# Altium PCB slave.PcbDoc (part 7 of 8)
Units mm, origin at the board's own origin, x right, y up, seen from the top; angles counter-clockwise.
Board outline 160 x 100 mm, 6 copper layers (Top, FUSED_VBAT-, Signals1, Signals2, SUPPLY, Bottom), stack 1.67 mm thick; 582 components, 375 nets, 1615 pads, 3043 vias.
Unrouted connection lines stored in the file: 1.
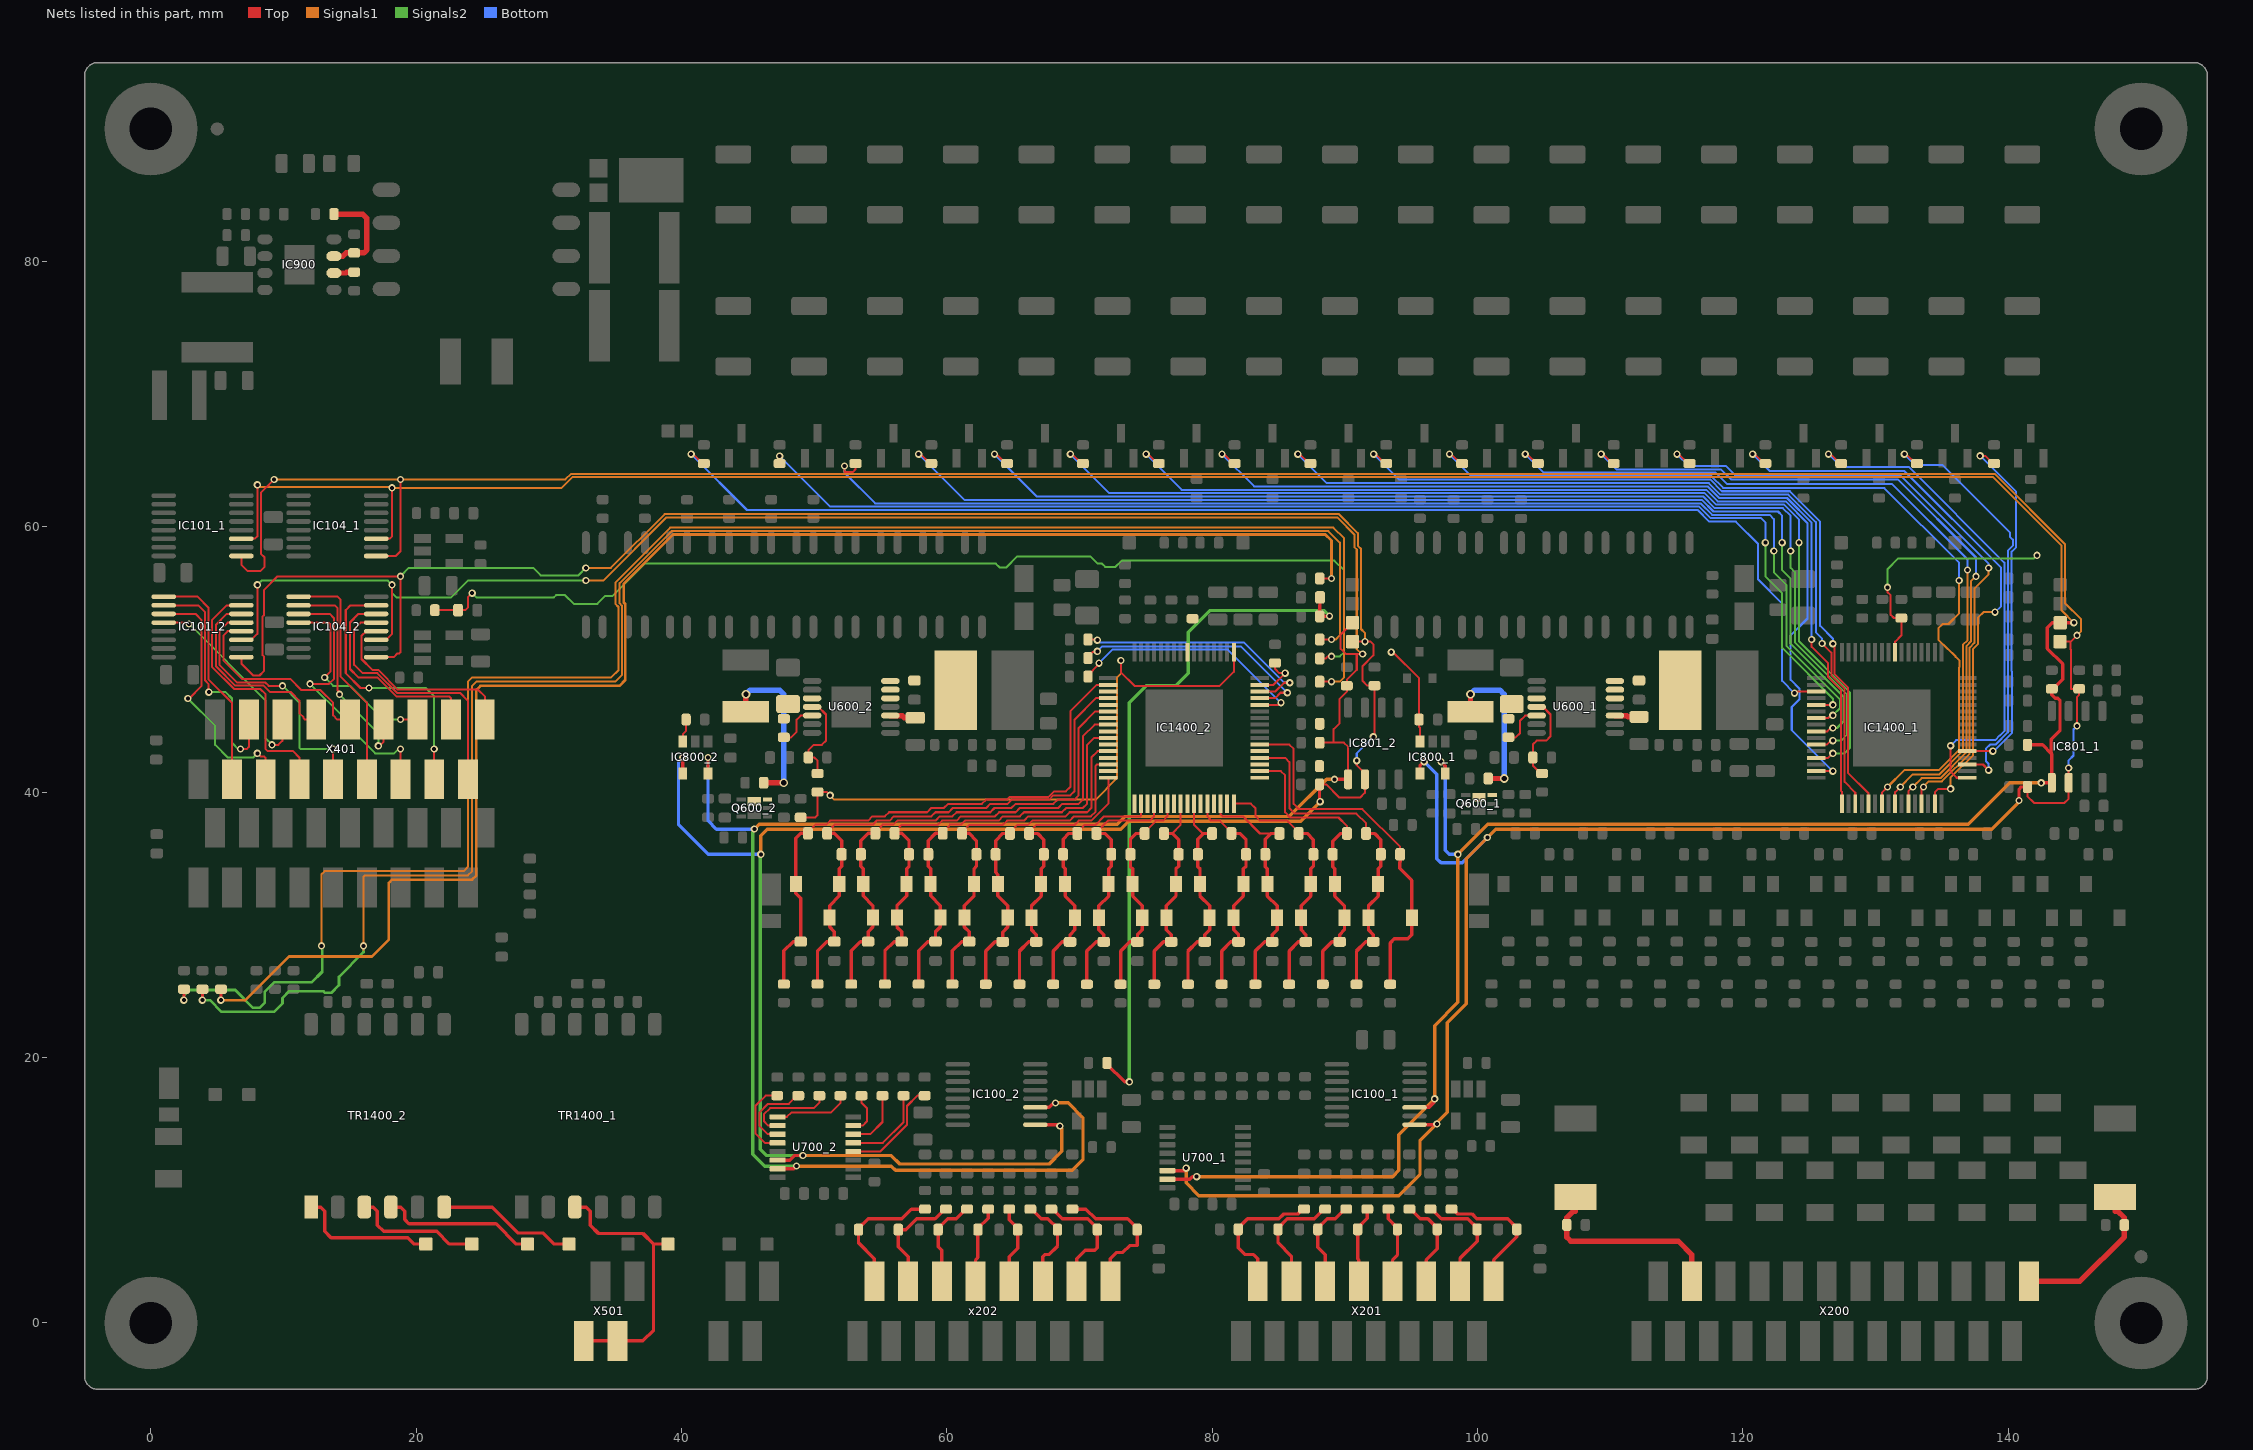
[diagram p10: the nets of this part, all layers, seen from the top]

## Via types
v1: diameter 0.55, hole 0.3, Top to Bottom, tented both sides, 2963 vias
v2: diameter 0.55, hole 0.3, Top to Bottom, 41 vias
v3: diameter 0.75, hole 0.5, Top to Bottom, tented both sides, 22 vias
v4: diameter 0.65, hole 0.4, Top to Bottom, tented both sides, 16 vias
v5: diameter 0.75, hole 0.5, Top to Bottom, 1 vias

## Nets (pads, with @x,y where several pads share a name; then routed paths per layer and width w, separated by ;. In a path a pad name is that pad's centre, name@x,y a point inside that pad or via, vN(x,y) a via of type N, cw(c..) or ccw(c..) an arc to the next point about the centre after c; other vN are vias at no path point) (continued)
PRIMARY-OUT-: TP1407_1.1 TR1400_1.3 X501.1 X501.3 | length 21.1
  Top w0.254: TR1400_1.3@32.054,8.426 32.054,8.73 32.815,8.73 33.118,8.426 33.118,7.362 33.741,6.74 37.093,6.74 37.887,5.946 ; X501.1@32.63,-1.357 37.075,-1.357 37.887,-0.544 37.887,5.946 ; TP1407_1.1@38.98,5.946 37.887,5.946
PRIMARY-S1: IC1400_1.37 R1517.2 | length 27.4
  Top w0.152: IC1400_1.37@136.963,43.09 138.83,43.09 v1(138.833,43.093) ; v1(137.881,65.35) 138.251,65.35 138.824,64.777 R1517.2@138.924,64.777 ; R1517.2@139.051,64.777 R1517.2@139.151,64.777
  Bottom w0.152: v1(137.881,65.35) 140.594,62.637 140.594,58.475 140.247,58.128 140.247,49.136 140.293,49.09 140.293,44.479 138.907,43.093 v1(138.833,43.093)
PRIMARY-S2: IC1400_1.35 R1516.2 | length 32.6
  Top w0.152: v1(132.166,65.477) 132.318,65.477 133.018,64.777 R1516.2@133.118,64.777 ; IC1400_1.35@136.913,42.09 138.091,42.09 v1(138.516,41.665)
  Bottom w0.152: v1(132.166,65.477) 132.963,64.68 135.023,64.68 140.12,59.583 140.12,59.259 140.34,59.039 140.34,58.58 139.959,58.199 139.959,44.505 139.049,43.594 138.626,43.594 138.304,43.272 138.304,42.353 138.508,42.149 ; v1(138.516,41.665) 138.516,42.141
PRIMARY-S3: IC1400_1.33 R1515.2 | length 38.5
  Top w0.152: v1(126.451,65.477) 126.603,65.477 127.303,64.777 R1515.2@127.403,64.777 ; v1(135.658,43.501) 135.658,41.543 136.112,41.09 IC1400_1.33@136.913,41.09
  Bottom w0.152: v1(126.451,65.477) 127.403,64.525 132.483,64.525 139.705,57.303 139.705,44.61 139.38,44.285 139.369,44.285 139.001,43.917 136.074,43.917 135.655,43.498 v1@135.655,43.495
PRIMARY-S4: IC1400_1.31 R1514.2 | length 44.5
  Top w0.152: v1(120.736,65.477) 120.888,65.477 121.588,64.777 R1514.2@121.688,64.777 ; IC1400_1.31@134.463,39.09 134.463,39.993 134.727,40.257 v1(135.658,40.257)
  Signals1 w0.152: v1(135.658,40.257) 135.658,41.117 137.341,42.8 137.341,50.798 137.722,51.179 137.722,53.171 138.127,53.577 138.986,53.577 v1(138.992,53.571)
  Bottom w0.152: v1(120.736,65.477) 122.006,64.207 132.166,64.207 139.451,56.922 139.451,54.03 v1(138.992,53.571)
PRIMARY-S5: IC1400_1.29 R1513.2 | length 48.9
  Top w0.152: v1(115.021,65.477) 115.173,65.477 115.873,64.777 R1513.2@115.973,64.777 ; IC1400_1.29@133.463,39.09 133.463,40.257 v1(133.601,40.395)
  Signals1 w0.152: v1(133.601,40.395) 134.018,40.812 134.994,40.812 137.087,42.905 137.087,50.903 137.436,51.253 137.436,55.349 138.516,56.428 v1(138.516,56.905)
  Bottom w0.152: v1(115.021,65.477) 115.909,64.589 118.715,64.589 119.415,63.89 131.841,63.89 138.516,57.215 v1(138.516,56.905)
PRIMARY-S6: IC1400_1.27 R1512.2 | length 54.2
  Top w0.152: v1(109.309,65.477) 109.458,65.477 110.158,64.777 R1512.2@110.258,64.777 ; IC1400_1.27@132.463,39.14 132.463,40.057 v1(132.801,40.395)
  Signals1 w0.152: v1(132.801,40.395) 133.472,41.066 134.889,41.066 136.833,43.01 136.833,51.009 137.182,51.358 137.182,55.889 v1(137.563,56.27)
  Bottom w0.152: v1(109.309,65.477) 110.451,64.335 118.335,64.335 119.097,63.573 126.452,63.573 126.453,63.572 131.68,63.572 137.563,57.689 v1(137.563,56.27)
PRIMARY-S7: IC1400_1.25 R1535.2 | length 59.8
  Top w0.152: v1(103.591,65.477) 103.743,65.477 104.443,64.777 R1535.2@104.543,64.777 ; IC1400_1.25@131.463,39.09 131.463,40.01 131.473,40.01 v1(131.858,40.395)
  Signals1 w0.152: v1(131.858,40.395) 132.811,41.347 134.811,41.347 136.579,43.115 136.579,51.114 136.928,51.463 v1(136.928,56.746)
  Bottom w0.152: v1(103.591,65.477) 104.987,64.081 117.942,64.081 118.781,63.242 131.226,63.242 136.928,57.54 v1(136.928,56.746)
PRIMARY-S8: IC1400_1.23 R1534.2 | length 66.8
  Top w0.152: v1(97.876,65.477) 98.028,65.477 98.728,64.777 R1534.2@98.828,64.777 ; IC1400_1.23@130.463,39.09 130.463,39.962 v1(130.896,40.395)
  Signals1 w0.152: v1(130.896,40.395) 132.166,41.665 134.769,41.665 136.293,43.189 136.293,49.409 136.325,49.441 136.325,49.9 136.025,50.2 136.025,50.23 135.446,50.809 135.416,50.809 134.723,51.502 134.723,52.352 135.048,52.676 135.489,52.676 136.293,53.481 v1(136.293,55.952)
  Bottom w0.152: v1(97.876,65.477) 99.526,63.827 117.623,63.827 118.513,62.937 125.828,62.937 125.841,62.925 130.662,62.925 136.293,57.293 v1(136.293,55.952)
PRIMARY-S9: IC1400_1.21 R1533.2 | length 59.8
  Top w0.152: v1(92.161,65.477) 92.313,65.477 93.013,64.777 R1533.2@93.113,64.777 ; v1(126.768,51.19) 126.909,51.049 126.909,48.905 127.911,47.902 127.911,41.474 129.463,39.922 IC1400_1.21@129.463,39.09
  Bottom w0.152: v1(92.161,65.477) 94.065,63.573 117.518,63.573 118.408,62.683 123.53,62.683 125.816,60.397 125.816,52.539 126.768,51.586 126.768,51.22 v1@126.788,51.201
PRIMARY-S10: IC1400_1.19 R1532.2 | length 64.9
  Top w0.152: v1(86.446,65.477) 86.598,65.477 87.298,64.777 R1532.2@87.398,64.777 ; v1(125.97,51.204) 126.655,50.519 126.655,48.799 127.657,47.797 127.657,40.776 128.463,39.97 IC1400_1.19@128.463,39.09
  Bottom w0.152: v1(86.446,65.477) 88.622,63.301 117.431,63.301 118.303,62.429 123.425,62.429 125.498,60.355 125.498,52.043 125.962,51.58 v1@125.962,51.205
PRIMARY-S11: IC1400_1.17 R1531.2 | length 70
  Top w0.152: v1(80.731,65.477) 80.883,65.477 81.583,64.777 R1531.2@81.683,64.777 ; v1(125.181,51.507) 125.181,50.963 126.401,49.743 126.401,48.694 127.403,47.692 127.403,40.077 127.463,40.017 IC1400_1.17@127.463,39.09
  Bottom w0.152: v1(80.731,65.477) 83.161,63.047 117.326,63.047 118.198,62.175 123.319,62.175 125.181,60.314 v1(125.181,51.507)
PRIMARY-S12: IC1400_1.15 R1530.2 | length 75.6
  Top w0.152: v1(75.016,65.477) 75.168,65.477 75.868,64.777 R1530.2@75.968,64.777 ; IC1400_1.15@125.463,41.59 v1(126.768,41.59)
  Bottom w0.152: v1(75.016,65.477) 77.7,62.793 117.221,62.793 118.093,61.921 123.214,61.921 124.863,60.272 124.863,53.095 123.593,51.825 123.593,48.462 124.263,47.792 124.263,47.01 123.676,46.424 123.676,44.682 v1@126.767,41.591
PRIMARY-S13: IC1400_1.13 R1553.2 | length 79.9
  Top w0.152: v1(69.301,65.477) 69.453,65.477 70.153,64.777 R1553.2@70.253,64.777 ; IC1400_1.13@125.463,42.59 126.423,42.59 v1(126.768,42.935)
  Signals2 w0.152: v1(124.228,58.81) 124.228,51.358 128.085,47.502 128.085,43.367 127.652,42.935 v1(126.768,42.935)
  Bottom w0.152: v1(69.301,65.477) 72.239,62.539 117.115,62.539 117.987,61.667 123.109,61.667 124.228,60.548 v1(124.228,58.81)
PRIMARY-S14: IC1400_1.11 R1552.2 | length 84.1
  Top w0.152: v1(63.586,65.477) 63.738,65.477 64.438,64.777 R1552.2@64.538,64.777 ; IC1400_1.11@125.463,43.59 126.312,43.59 126.61,43.887 v1(126.768,43.887)
  Signals2 w0.152: v1(123.593,58.175) 123.593,56.905 123.911,56.587 123.911,51.316 127.831,47.396 127.831,44.315 127.403,43.887 v1(126.768,43.887)
  Bottom w0.152: v1(63.586,65.477) 66.778,62.285 117.01,62.285 117.882,61.413 123.004,61.413 123.593,60.824 v1(123.593,58.175)
PRIMARY-S15: IC1400_1.9 R1551.2 | length 88.1
  Top w0.152: v1(57.871,65.477) 58.023,65.477 58.723,64.777 R1551.2@58.823,64.777 ; IC1400_1.9@125.463,44.59 126.36,44.59 126.61,44.84 v1(126.768,44.84)
  Signals2 w0.152: v1(122.958,58.81) 122.958,56.736 123.593,56.101 123.593,51.19 127.577,47.206 127.577,45.331 127.086,44.84 v1(126.768,44.84)
  Bottom w0.152: v1(57.871,65.477) 61.317,62.031 116.905,62.031 117.777,61.159 122.641,61.159 122.958,60.842 v1(122.958,58.81)
PRIMARY-S16: IC1400_1.7 R1550.2 | length 92.3
  Top w0.152: v1(52.283,64.588) 52.283,64.144 52.926,64.144 53.108,64.326 R1550.2@53.108,64.777 ; IC1400_1.7@125.463,45.59 126.407,45.59 126.61,45.792 v1(126.768,45.792)
  Signals2 w0.152: v1(122.323,58.175) 122.323,56.587 123.276,55.635 123.276,51.031 127.323,46.984 127.323,46.347 v1(126.768,45.792)
  Bottom w0.152: v1(52.283,64.588) 52.283,64.08 54.586,61.777 116.8,61.777 117.672,60.905 122.006,60.905 122.323,60.588 v1(122.323,58.175)
PRIMARY-S17: IC1400_1.5 R1549.2 | length 94.1
  Top w0.152: R1549.2@47.393,64.777 v1(47.393,65.332) ; IC1400_1.5@125.463,46.59 126.765,46.59 v1(126.768,46.586)
  Signals2 w0.152: v1(121.688,58.81) 121.688,56.27 122.958,55 122.958,50.872 126.768,47.062 v1(126.768,46.586)
  Bottom w0.152: v1(47.393,65.332) 51.202,61.523 116.695,61.523 117.566,60.651 121.371,60.651 121.688,60.334 v1(121.688,58.81)
PRIMARY-S18: IC1400_1.3 R1548.2 | length 98.5
  Top w0.152: v1(40.726,65.477) 40.878,65.477 41.578,64.777 R1548.2@41.678,64.777 ; v1(123.879,47.469) 123.986,47.469 124.107,47.59 IC1400_1.3@125.463,47.59
  Bottom w0.152: v1(40.726,65.477) 44.934,61.269 116.589,61.269 117.461,60.397 119.466,60.397 121.134,58.729 121.134,56.04 122.958,54.216 122.958,48.389 v1(123.879,47.469)
PRIMARY-SCL: IC100_1.1 IC101_1.1 IC104_1.1 IC800_1.4 IC801_1.6 R1417_1.1 R1420_1.1 TP1409_1.1 U700_1.14 | length 287.4
  Top w0.152: IC101_1.1@6.791,57.794 IC101_1.1@6.821,57.794 ; IC101_1.1@6.821,57.805 IC101_1.1@6.821,57.794 ; v1(9.293,63.572) 8.892,63.17 8.895,63.167 8.288,62.56 8.288,57.976 8.578,57.687 8.578,56.992 8.253,56.668 7.306,56.668 6.821,57.153 IC101_1.1@6.821,57.794 ; IC104_1.1@16.951,57.794 IC104_1.1@16.981,57.794 ; IC104_1.1@16.981,57.805 18.448,57.805 18.818,58.175 v1(18.818,63.572) ; R1417_1.1@141.438,40.395 141.438,39.695 141.945,39.188 144.231,39.188 144.548,39.506 IC801_1.6@144.548,40.711 v1(144.548,41.823) ; TP1409_1.1@143.893,51.348 144.707,51.348 ; v1(145.183,44.998) 145.183,47.181 145.342,47.339 R1420_1.1@145.342,47.791 144.707,47.791 144.707,50.755 144.692,50.769 144.692,51.334 144.707,51.348 ; v1(145.183,51.825) 144.707,51.348
  Top w0.254: U700_1.14@76.611,11.48 77.851,11.48 v1(78.032,11.661) ; IC100_1.1@95.245,14.942 96.871,14.942 v1(96.923,14.995) ; IC800_1.4@95.656,41.417 95.656,41.985 v1(95.971,42.3) ; v1(140.806,39.371) 140.806,40.214 140.987,40.395 R1417_1.1@141.438,40.395
  Signals1 w0.152: v1(9.293,63.572) v1(18.818,63.572) 31.244,63.572 31.672,64 138.964,64 144.274,58.689 144.274,54.236 145.49,53.02 145.49,52.131 v1(145.183,51.825)
  Signals1 w0.254: v1(78.032,11.661) 78.032,10.55 78.985,9.597 94.066,9.597 95.653,11.185 95.653,13.725 v1(96.923,14.995) 96.923,15.091 97.717,15.885 97.717,22.615 99.146,24.043 99.146,34.997 v1(100.733,36.585) 101.368,37.22 101.686,37.22 138.742,37.22 140.806,39.283 v1(140.806,39.371)
  Bottom w0.152: v1(144.548,41.823) 144.548,42.405 144.912,42.768 144.912,44.727 v1(145.183,44.998)
  Bottom w0.254: v1(95.971,42.3) 96.923,41.347 96.923,34.997 97.241,34.68 98.828,34.68 v1(100.733,36.585)
PRIMARY-SDA: IC100_1.3 IC101_1.3 IC104_1.3 IC800_1.5 IC801_1.5 R1415_1.1 R1419_1.1 TP1408_1.1 U700_1.15 | length 273.5
  Top w0.152: IC101_1.3@6.821,59.105 7.847,59.105 8.023,59.281 v1(8.023,63.17) ; IC104_1.3@16.981,59.105 18.007,59.105 18.183,59.281 v1(18.183,62.937)
  Top w0.254: U700_1.15@76.611,10.83 78.312,10.83 78.508,11.026 v1(78.826,11.026) ; IC100_1.3@95.245,16.242 96.362,16.242 96.708,16.588 96.708,16.835 v1(96.765,16.892) ; v1(97.241,42.3) 97.556,41.985 IC800_1.5@97.556,41.417 ; R1415_1.1@141.438,43.57 142.58,43.57 143.245,42.905 ; v1(142.482,40.711) IC801_1.5@143.278,40.711 143.278,42.871 143.245,42.905 ; v1(144.936,52.777) TP1408_1.1@143.913,52.777 143.312,52.777 142.941,52.406 142.941,50.828 144.104,49.665 144.104,48.516 143.378,47.791 R1419_1.1@143.278,47.791 143.278,47.339 143.528,47.089 143.729,47.089 143.893,46.925 143.893,44.626 143.245,43.977 143.245,42.905
  Signals1 w0.152: v1(8.023,63.17) 8.176,63.018 18.103,63.018 v1(18.183,62.937) 30.968,62.937 31.777,63.746 138.859,63.746 144.02,58.584 144.02,53.693 v1(144.936,52.777)
  Signals1 w0.254: v1(78.826,11.026) 93.59,11.026 94.066,11.502 94.066,14.193 v1(96.765,16.892) 96.765,22.408 98.511,24.155 v1(98.511,35.315) 100.771,37.575 101.686,37.575 136.966,37.575 140.102,40.711 v1(142.482,40.711)
  Bottom w0.254: v1(97.241,42.3) 97.558,41.982 97.558,35.632 97.876,35.315 v1(98.511,35.315)
PRIMARY-T-SENSOR_0: R107_1.1 R112_1.2 X201.16 | length 10.2
  Top w0.254: R112_1.2@98.035,8.58 98.135,8.58 98.505,8.209 99.581,8.209 99.94,7.851 102.261,7.851 102.959,7.153 102.959,6.494 101.21,4.745 X201.16@101.21,3.143
PRIMARY-T-SENSOR_1: R106_1.1 R113_1.2 X201.14 | length 8.6
  Top w0.254: R113_1.2@96.447,8.58 96.547,8.58 97.276,7.851 99.261,7.851 99.959,7.153 R106_1.1@99.959,7.053 99.959,6.144 98.67,4.854 X201.14@98.67,3.143
PRIMARY-T-SENSOR_2: R105_1.1 R114_1.2 X201.12 | length 7
  Top w0.254: R114_1.2@94.86,8.58 94.96,8.58 95.688,7.851 96.261,7.851 96.959,7.153 R105_1.1@96.959,7.053 96.959,5.574 96.13,4.745 X201.12@96.13,3.143
PRIMARY-T-SENSOR_3: R104_1.1 R115_1.2 X201.10 | length 5.9
  Top w0.254: R115_1.2@93.272,8.58 93.272,7.84 93.959,7.153 R104_1.1@93.959,7.053 93.959,5.114 93.59,4.745 X201.10@93.59,3.143
PRIMARY-T-SENSOR_4: R103_1.1 R116_1.2 X201.8 | length 5.8
  Top w0.254: X201.8@91.05,3.143 91.05,4.745 90.959,4.836 R103_1.1@90.959,7.053 90.959,7.153 91.685,7.878 R116_1.2@91.685,8.58
PRIMARY-T-SENSOR_5: R102_1.1 R117_1.2 X201.6 | length 7
  Top w0.254: X201.6@88.51,3.143 88.51,5.152 87.959,5.703 R102_1.1@87.959,7.053 87.959,7.153 88.657,7.851 89.268,7.851 89.997,8.58 R117_1.2@90.097,8.58
PRIMARY-T-SENSOR_6: R101_1.1 R118_1.2 X201.4 | length 8.6
  Top w0.254: X201.4@85.97,3.143 85.97,5.024 84.959,6.035 R101_1.1@84.959,7.053 84.959,7.153 85.657,7.851 87.681,7.851 88.41,8.58 R118_1.2@88.51,8.58
PRIMARY-T-SENSOR_7: R100_1.1 R119_1.2 X201.2 | length 10.5
  Top w0.254: X201.2@83.43,3.143 83.43,4.835 83.112,5.152 82.477,5.152 81.959,5.67 R100_1.1@81.959,7.053 81.959,7.153 82.657,7.851 85.017,7.851 85.375,8.209 86.452,8.209 86.822,8.58 R119_1.2@86.922,8.58
PRIMARY-TEMP-ALERT: IC800_1.3 R800_1.1 | length 7.7
  Top w0.152: v1(93.491,50.555) 93.62,50.555 95.588,48.586 R800_1.1@95.588,45.475 95.588,44.923 95.656,44.856 IC800_1.3@95.656,43.817
PRIMARY-WDT: IC1400_1.56 R1404_1.1 | length 18.9
  Top w0.152: v1(130.896,55.444) 130.896,55.085 131.13,54.851 131.13,53.372 131.142,53.372 131.384,53.13 R1404_1.1@131.936,53.13 131.936,51.814 131.463,51.341 IC1400_1.56@131.463,50.54
  Signals2 w0.152: v1(130.896,55.444) 130.896,56.813 131.7,57.618 141.928,57.618 v1(142.167,57.857)
R_FB: IC900.6 R904.1 | length 1.6
  Top w0.406: IC900.6@13.8,79.13 14.709,79.13 14.774,79.195 R904.1@15.326,79.195
R_REF: IC900.7 R902.2 R905.2 | length 7.7
  Top w0.406: IC900.7@13.8,80.4 14.473,80.4 14.725,80.652 R902.2@15.326,80.652 16.066,80.652 16.278,80.865 16.278,83.257 15.961,83.575 R905.2@13.803,83.575
RON_1: R600_1.1 U600_1.5 | length 3.4
  Top w0.152: R600_1.1@102.321,44.14 102.872,44.14 103.192,44.459 103.192,45.393 103.576,45.777 U600_1.5@104.451,45.777
RON_2: R600_2.1 U600_2.5 | length 3.3
  Top w0.152: R600_2.1@47.711,44.14 48.262,44.14 48.672,44.55 48.672,45.47 48.971,45.768 ; 48.966,45.777 U600_2.5@49.841,45.777
SECONDARY-ANALOG-IN_0: IC104_2.4 X401.1 | length 15.2
  Top w0.152: IC104_2.4@16.981,52.135 16.231,52.135 15.878,51.782 15.878,50.038 16.695,49.221 17.136,49.221 18.623,47.734 24.655,47.734 25.168,47.221 X401.1@25.168,45.475
SECONDARY-ANALOG-IN_1: IC104_2.5 X401.2 | length 20.2
  Top w0.152: IC104_2.5@16.981,52.785 15.81,52.785 15.326,52.301 15.326,49.602 15.961,48.967 17.072,48.967 18.559,47.48 23.322,47.48 23.898,46.903 X401.2@23.898,40.975
SECONDARY-ANALOG-IN_2: IC104_2.6 X401.3 | length 15.9
  Top w0.152: IC104_2.6@16.981,53.435 15.653,53.435 15.008,52.79 15.008,49.285 15.643,48.65 17.072,48.65 18.501,47.221 22.47,47.221 22.628,47.062 X401.3@22.628,45.475
SECONDARY-ANALOG-IN_3: IC104_2.7 X401.4 | length 20.8
  Top w0.152: v2(16.437,47.856) 15.802,47.856 14.691,48.967 14.691,53.73 15.046,54.085 IC104_2.7@16.951,54.085 ; X401.4@21.358,40.975 v2(21.358,43.252)
  Signals2 w0.152: v2(16.437,47.856) 20.723,47.856 21.358,47.221 v2(21.358,43.252)
SECONDARY-ANALOG-IN_4: IC104_2.12 X401.5 | length 15
  Top w0.152: IC104_2.12@11.131,52.785 13.413,52.785 13.556,52.642 13.556,49.102 v1(13.103,48.65) ; v2(18.818,45.475) X401.5@20.088,45.475
  Signals2 w0.152: v1(13.103,48.65) 13.738,48.015 15.008,48.015 17.548,45.475 v2(18.818,45.475)
SECONDARY-ANALOG-IN_5: IC104_2.11 X401.6 | length 20.9
  Top w0.152: IC104_2.11@11.131,53.435 13.468,53.435 13.802,53.101 13.802,52.755 13.81,52.747 13.81,48.562 13.421,48.173 v2(11.992,48.173) ; X401.6@18.818,40.975 v2(18.818,43.252)
  Signals2 w0.152: v2(11.992,48.173) 14.491,45.675 14.491,45.357 16.913,42.935 18.342,42.935 18.66,43.252 v2(18.818,43.252)
SECONDARY-ANALOG-IN_6: IC104_2.10 X401.7 | length 16.6
  Top w0.152: IC104_2.10@11.131,54.085 13.86,54.085 14.056,53.888 14.056,52.861 14.064,52.853 14.064,47.69 14.139,47.615 14.139,47.563 14.236,47.466 v2@14.287,47.466 ; v2@17.328,43.581 17.548,43.801 X401.7@17.548,45.475
  Signals2 w0.152: v2(14.215,47.38) 17.145,44.449 v2(17.145,43.498)
SECONDARY-ANALOG-IN_7: IC104_2.9 X401.8 | length 17.6
  Top w0.152: IC104_2.9@11.131,54.735 14.078,54.735 14.31,54.503 14.31,48.714 16.278,46.745 X401.8@16.278,40.975
SECONDARY-ANALOG-IN_8: IC101_2.4 X401.9 | length 15.3
  Top w0.152: IC101_2.4@6.821,52.135 5.793,52.135 5.483,51.825 5.483,49.92 6.863,48.54 10.514,48.54 11.357,47.697 12.786,47.697 13.738,46.745 13.738,45.792 14.056,45.475 X401.9@15.008,45.475
SECONDARY-ANALOG-IN_9: IC101_2.5 X401.10 | length 19.9
  Top w0.152: IC101_2.5@6.821,52.785 5.794,52.785 5.166,52.156 5.166,49.602 6.482,48.286 8.606,48.286 8.877,48.015 v2(9.928,48.015) ; X401.10@13.738,40.975 v2(13.738,43.252)
  Signals2 w0.152: v2(9.928,48.015) 11.198,46.745 11.198,43.341 11.288,43.252 v2(13.738,43.252)
SECONDARY-ANALOG-IN_10: IC101_2.6 X401.11 | length 15.2
  Top w0.152: IC101_2.6@6.821,53.435 5.716,53.435 4.912,52.631 4.912,49.497 6.377,48.032 8.5,48.032 8.993,47.538 10.563,47.538 11.198,46.903 11.198,45.951 11.516,45.633 11.516,45.576 11.617,45.475 X401.11@12.468,45.475
SECONDARY-ANALOG-IN_11: IC101_2.7 X401.12 | length 19.7
  Top w0.152: IC101_2.7@6.791,54.085 5.716,54.085 4.594,52.963 4.594,49.455 6.272,47.778 8.26,47.778 8.658,47.38 8.658,43.252 8.817,43.093 10.722,43.093 11.198,42.617 X401.12@11.198,40.975
SECONDARY-ANALOG-IN_12: IC101_2.12 X401.13 | length 16.2
  Top w0.152: IC101_2.12@0.971,52.785 2.778,52.785 v1(2.88,52.683) ; v2(9.135,43.57) 9.611,43.57 9.914,43.873 9.928,43.873 X401.13@9.928,45.475
  Signals2 w0.152: v1(2.88,52.683) 8.658,46.904 8.658,44.046 v2(9.135,43.57)
SECONDARY-ANALOG-IN_13: IC101_2.11 X401.14 | length 19.9
  Top w0.152: IC101_2.11@0.971,53.435 3.365,53.435 3.832,52.968 3.832,48.015 2.88,47.062 v2(2.785,47.062) ; v2(8.023,42.935) 8.055,42.935 8.305,42.684 8.551,42.684 8.658,42.576 X401.14@8.658,40.975
  Signals2 w0.152: v2(2.785,47.062) 4.848,44.998 4.848,43.57 5.801,42.617 7.706,42.617 v2(8.023,42.935)
SECONDARY-ANALOG-IN_14: IC101_2.10 X401.15 | length 18.3
  Top w0.152: IC101_2.10@1,54.085 3.578,54.085 4.086,53.577 4.086,48.417 4.34,48.163 4.34,47.57 v2(4.372,47.538) ; v2(6.753,43.252) 7.23,43.252 7.388,43.411 X401.15@7.388,45.475
  Signals2 w0.152: v2(4.372,47.538) 5.642,47.538 6.118,47.062 6.118,43.728 6.595,43.252 v2(6.753,43.252)
SECONDARY-ANALOG-IN_15: IC101_2.9 X401.16 | length 17.4
  Top w0.152: IC101_2.9@0.971,54.735 3.526,54.735 4.34,53.92 4.34,48.523 6.118,46.745 X401.16@6.118,40.975
SECONDARY-C0: C1311_2.2 IC1400_2.38 R1306_2.2 Z1305_2.2 | length 28.1
  Top w0.152: IC1400_2.38@83.623,43.59 85.811,43.59 86.128,43.272 86.128,39.125 86.524,38.729 91.318,38.729 94.156,35.891 C1311_2.2@94.156,35.315
  Top w0.254: R1306_2.2@93.411,25.575 93.411,28.635 93.728,28.952 94.728,28.952 95.046,29.27 95.046,33.35 94.136,34.26 94.136,34.718 94.156,34.738 C1311_2.2@94.156,35.315
SECONDARY-C1: C1305_2.1 C1310_2.2 C1311_2.1 IC1400_2.36 R1305_2.2 Z1304_2.2 Z1305_2.1 | length 26.3
  Top w0.152: IC1400_2.36@83.623,42.59 85.493,42.59 85.811,42.272 85.811,38.807 86.228,38.39 90.864,38.39 91.596,37.658 C1310_2.2@91.596,36.89
  Top w0.254: R1305_2.2@90.871,25.525 90.871,28.031 91.564,28.725 C1305_2.1@92.141,28.725 ; C1310_2.2@91.596,36.89 92.228,36.89 92.706,36.412 C1311_2.1@92.706,35.315 92.706,34.428 92.506,34.228 Z1304_2.2@92.506,33.08 92.506,32.175 91.776,31.445 91.776,29.635 92.141,29.27 C1305_2.1@92.141,28.865
SECONDARY-C2: C1304_2.1 C1309_2.2 C1310_2.1 IC1400_2.34 R1304_2.2 Z1303_2.2 Z1304_2.1 | length 23.8
  Top w0.152: IC1400_2.34@83.623,41.59 85.176,41.59 85.493,41.272 85.493,38.49 85.887,38.096 89.516,38.096 90.146,37.466 C1310_2.1@90.146,36.89
  Top w0.254: R1304_2.2@88.331,25.525 88.331,28.031 89.024,28.725 C1304_2.1@89.601,28.725 ; C1304_2.1@89.601,28.865 89.601,29.27 89.966,29.635 89.966,31.445 89.236,32.175 Z1304_2.1@89.236,33.08 89.236,34.228 89.076,34.388 C1309_2.2@89.076,35.315 89.076,36.296 89.669,36.89 C1310_2.1@90.146,36.89
SECONDARY-C3: C1303_2.1 C1308_2.2 C1309_2.1 IC1400_2.32 R1303_2.2 Z1302_2.2 Z1303_2.1 | length 19.6
  Top w0.152: IC1400_2.32@81.623,39.14 82.903,39.14 83.271,38.772 83.271,38.172 83.588,37.855 85.651,37.855 86.516,36.99 C1308_2.2@86.516,36.89
  Top w0.254: R1303_2.2@85.791,25.525 85.791,28.031 86.484,28.725 C1303_2.1@87.061,28.725 ; C1308_2.2@86.656,36.89 87.148,36.89 87.606,36.432 87.606,35.911 87.626,35.891 C1309_2.1@87.626,35.315 87.626,34.428 87.426,34.228 Z1302_2.2@87.426,33.08 87.426,32.175 86.696,31.445 86.696,29.635 87.061,29.27 C1303_2.1@87.061,28.865
SECONDARY-C4: C1302_2.1 C1307_2.2 C1308_2.1 IC1400_2.30 R1302_2.2 Z1301_2.2 Z1302_2.1 | length 18.6
  Top w0.152: IC1400_2.30@80.623,39.14 80.623,38.338 80.789,38.172 82.318,38.172 83.601,36.89 84.433,36.89
  Top w0.254: R1302_2.2@83.251,25.525 83.251,28.031 83.944,28.725 C1302_2.1@84.521,28.725 ; C1302_2.1@84.521,28.865 84.521,29.27 84.886,29.635 84.886,31.445 84.156,32.175 Z1302_2.1@84.156,33.08 84.156,34.228 83.996,34.388 C1307_2.2@83.996,35.315 83.996,36.452 84.433,36.89 C1308_2.1@85.066,36.89
SECONDARY-C5: C1301_2.1 C1306_2.2 C1307_2.1 IC1400_2.28 R1301_2.2 Z1300_2.2 Z1301_2.1 | length 16.6
  Top w0.152: IC1400_2.28@79.623,39.09 79.623,38.172 79.941,37.855 80.571,37.855 81.436,36.99 C1306_2.2@81.436,36.89
  Top w0.254: R1301_2.2@80.711,25.525 80.711,28.031 81.404,28.725 C1301_2.1@81.981,28.725 ; C1306_2.2@81.576,36.89 82.068,36.89 82.546,36.412 C1307_2.1@82.546,35.315 82.546,34.428 82.346,34.228 Z1300_2.2@82.346,33.08 82.346,32.368 82.346,32.175 81.616,31.445 81.616,29.635 81.981,29.27 C1301_2.1@81.981,28.865
SECONDARY-C6: C1300_2.1 C1306_2.1 C1323_2.2 IC1400_2.26 R1300_2.2 Z1300_2.1 Z1311_2.2 | length 15.8
  Top w0.152: IC1400_2.26@78.623,39.09 78.623,37.537 79.271,36.89
  Top w0.254: R1300_2.2@78.171,25.525 78.171,28.031 78.864,28.725 C1300_2.1@79.441,28.725 ; 79.271,36.89 79.353,36.89 ; C1300_2.1@79.441,28.865 79.441,29.27 79.806,29.635 79.806,31.445 79.076,32.175 Z1300_2.1@79.076,33.08 79.076,34.228 78.916,34.388 C1323_2.2@78.916,35.315 78.916,36.452 79.353,36.89 ; C1306_2.1@79.846,36.89 79.353,36.89
SECONDARY-C7: C1317_2.1 C1322_2.2 C1323_2.1 IC1400_2.24 R1312_2.2 Z1310_2.2 Z1311_2.1 | length 15.8
  Top w0.152: 76.976,36.89 77.623,37.537 IC1400_2.24@77.623,39.09
  Top w0.254: R1312_2.2@75.631,25.525 75.631,28.031 76.324,28.725 C1317_2.1@76.901,28.725 ; C1322_2.2@76.496,36.89 76.976,36.89 77.466,36.4 C1323_2.1@77.466,35.315 77.466,34.428 77.266,34.228 Z1310_2.2@77.266,33.08 77.266,32.175 76.536,31.445 76.536,29.635 76.901,29.27 C1317_2.1@76.901,28.865
SECONDARY-C8: C1316_2.1 C1321_2.2 C1322_2.1 IC1400_2.22 R1311_2.2 Z1309_2.2 Z1310_2.1 | length 16.6
  Top w0.152: C1322_2.1@74.766,36.89 C1322_2.1@74.836,36.96 ; C1322_2.1@74.906,36.89 74.906,36.99 75.731,37.815 75.731,37.855 76.306,37.855 76.623,38.172 IC1400_2.22@76.623,39.09
  Top w0.254: R1311_2.2@73.091,25.525 73.091,28.031 73.784,28.725 C1316_2.1@74.361,28.725 ; C1316_2.1@74.361,28.865 74.361,29.27 74.726,29.635 74.726,31.445 73.996,32.175 73.996,32.368 Z1310_2.1@73.996,33.08 73.996,34.228 73.836,34.388 C1321_2.2@73.836,35.315 73.836,36.452 74.273,36.89 C1322_2.1@74.766,36.89
SECONDARY-C9: C1315_2.1 C1320_2.2 C1321_2.1 IC1400_2.20 R1310_2.2 Z1308_2.2 Z1309_2.1 | length 19.2
  Top w0.152: C1320_2.2@71.276,36.89 71.276,36.99 72.141,37.855 75.306,37.855 75.623,38.172 IC1400_2.20@75.623,39.09
  Top w0.254: R1310_2.2@70.551,25.525 70.551,28.031 71.244,28.725 C1315_2.1@71.821,28.725 ; C1320_2.2@71.416,36.89 71.908,36.89 72.386,36.412 C1321_2.1@72.386,35.315 72.386,34.428 72.186,34.228 Z1308_2.2@72.186,33.08 72.186,32.368 72.186,32.175 71.456,31.445 71.456,29.635 71.821,29.27 C1315_2.1@71.821,28.865
SECONDARY-C10: C1314_2.1 C1319_2.2 C1320_2.1 IC1400_2.18 R1309_2.2 Z1307_2.2 Z1308_2.1 | length 19.5
  Top w0.152: C1320_2.1@69.826,36.89 69.826,36.99 70.379,37.542 71.211,37.542 71.841,38.172 74.54,38.172 74.623,38.256 IC1400_2.18@74.623,39.09
  Top w0.254: R1309_2.2@68.011,25.525 68.011,28.031 68.704,28.725 C1314_2.1@69.281,28.725 ; C1314_2.1@69.281,28.865 69.281,29.27 69.646,29.635 69.646,31.445 68.916,32.175 68.916,32.368 Z1308_2.1@68.916,33.08 68.916,34.228 68.756,34.388 C1319_2.2@68.756,35.315 68.756,36.452 69.193,36.89 C1320_2.1@69.686,36.89
SECONDARY-C11: C1313_2.1 C1318_2.2 C1319_2.1 IC1400_2.16 R1308_2.2 Z1306_2.2 Z1307_2.1 | length 22.2
  Top w0.152: C1318_2.2@66.196,36.89 66.196,36.99 66.749,37.542 69.624,37.542 69.936,37.855 70.888,37.855 72.173,39.14 IC1400_2.16@72.173,41.09
  Top w0.254: R1308_2.2@65.471,25.525 65.471,28.031 66.164,28.725 C1313_2.1@66.741,28.725 ; C1318_2.2@66.336,36.89 66.828,36.89 67.306,36.412 C1319_2.1@67.306,35.315 67.306,34.428 67.106,34.228 Z1306_2.2@67.106,33.08 67.106,32.175 66.376,31.445 66.376,29.635 66.741,29.27 C1313_2.1@66.741,28.865
SECONDARY-C12: C1312_2.1 C1318_2.1 C1335_2.2 IC1400_2.14 R1307_2.2 Z1306_2.1 Z1317_2.2 | length 25.1
  Top w0.152: C1318_2.1@64.746,36.89 64.746,36.99 65.299,37.542 66.126,37.542 66.438,37.855 69.259,37.855 69.577,38.172 70.847,38.172 71.206,38.531 71.206,41.982 71.313,42.09 IC1400_2.14@72.123,42.09
  Top w0.254: R1307_2.2@62.931,25.525 62.931,28.031 63.624,28.725 C1312_2.1@64.201,28.725 64.201,29.455 64.586,29.841 Z1317_2.2@64.586,30.552 64.586,31.457 63.836,32.207 63.836,32.368 Z1306_2.1@63.836,33.08 63.836,33.791 63.676,33.951 63.676,34.997 63.676,36.357 64.208,36.89 C1318_2.1@64.746,36.89
SECONDARY-C13: C1329_2.1 C1334_2.2 C1335_2.1 IC1400_2.12 R1318_2.2 Z1316_2.2 Z1317_2.1 | length 29.1
  Top w0.152: C1334_2.2@61.136,36.902 61.136,37.002 61.671,37.537 64.221,37.537 64.538,37.855 65.808,37.855 66.126,38.172 68.942,38.172 69.259,38.49 70.571,38.49 70.888,38.807 70.888,42.617 71.361,43.09 IC1400_2.12@72.123,43.09
  Top w0.254: R1318_2.2@60.411,25.537 60.411,28.044 61.104,28.737 C1329_2.1@61.681,28.737 61.681,29.476 61.316,29.841 Z1317_2.1@61.316,30.552 61.316,31.457 62.046,32.187 62.046,32.381 Z1316_2.2@62.046,33.092 62.046,34.241 62.226,34.421 62.226,34.997 62.226,36.357 61.681,36.902 C1334_2.2@61.363,36.902
SECONDARY-C14: C1328_2.1 C1333_2.2 C1334_2.1 IC1400_2.10 R1317_2.2 Z1315_2.2 Z1316_2.1 | length 31.5
  Top w0.152: C1334_2.1@59.686,36.902 59.686,37.002 60.239,37.555 61.064,37.555 61.363,37.855 63.903,37.855 64.221,38.172 65.491,38.172 65.808,38.49 68.666,38.49 68.983,38.807 70.253,38.807 70.571,39.125 70.571,43.57 71.091,44.09 IC1400_2.10@72.123,44.09
  Top w0.254: R1317_2.2@57.871,25.537 57.871,28.044 58.564,28.737 C1328_2.1@59.141,28.737 59.141,29.476 59.506,29.841 Z1315_2.2@59.506,30.552 59.506,31.457 58.776,32.187 Z1316_2.1@58.776,33.092 58.776,34.241 58.596,34.421 58.596,34.997 58.596,36.357 59.141,36.902 C1334_2.1@59.546,36.902
SECONDARY-C15: C1327_2.1 C1332_2.2 C1333_2.1 IC1400_2.8 R1316_2.2 Z1314_2.2 Z1315_2.1 | length 35.7
  Top w0.152: C1332_2.2@56.056,36.902 56.056,37.002 56.448,37.394 56.458,37.394 56.601,37.537 59.329,37.537 59.647,37.855 60.738,37.855 61.055,38.172 63.628,38.172 63.945,38.49 65.173,38.49 65.491,38.807 68.39,38.807 68.708,39.125 69.936,39.125 70.253,39.442 70.253,44.205 71.138,45.09 IC1400_2.8@72.123,45.09
  Top w0.254: R1316_2.2@55.331,25.537 55.331,28.044 56.024,28.737 C1327_2.1@56.601,28.737 56.601,29.476 56.236,29.841 Z1315_2.1@56.236,30.552 56.236,31.457 56.966,32.187 Z1314_2.2@56.966,33.092 56.966,34.241 57.146,34.421 57.146,34.997 57.146,36.357 56.601,36.902 C1332_2.2@56.196,36.902
SECONDARY-C16: C1326_2.1 C1331_2.2 C1332_2.1 IC1400_2.6 R1315_2.2 Z1313_2.2 Z1314_2.1 | length 37.7
  Top w0.152: C1332_2.1@54.606,36.902 54.606,37.002 55.159,37.555 55.966,37.555 56.266,37.855 59.141,37.855 59.458,38.172 60.411,38.172 60.728,38.49 63.268,38.49 63.586,38.807 64.856,38.807 65.173,39.125 68.031,39.125 68.348,39.442 69.618,39.442 69.936,39.76 69.936,44.84 71.186,46.09 IC1400_2.6@72.123,46.09
  Top w0.254: R1315_2.2@52.791,25.537 52.791,28.044 53.484,28.737 C1326_2.1@54.061,28.737 54.061,29.476 54.426,29.841 Z1313_2.2@54.426,30.552 54.426,31.457 53.696,32.187 Z1314_2.1@53.696,33.092 53.696,34.241 53.516,34.421 53.516,34.997 53.516,36.357 54.061,36.902 C1332_2.1@54.466,36.902
SECONDARY-C17: C1325_2.1 C1330_2.2 C1331_2.1 IC1400_2.4 R1314_2.2 Z1312_2.2 Z1313_2.1 | length 42
  Top w0.152: C1330_2.2@50.976,36.902 50.976,37.002 51.529,37.555 54.396,37.555 54.696,37.855 55.69,37.855 56.008,38.172 58.823,38.172 59.141,38.49 60.135,38.49 60.453,38.807 62.951,38.807 63.268,39.125 64.58,39.125 64.898,39.442 67.713,39.442 68.031,39.76 69.301,39.76 69.618,40.077 69.618,45.475 71.233,47.09 IC1400_2.4@72.123,47.09
  Top w0.254: R1314_2.2@50.251,25.537 50.251,28.044 50.944,28.737 C1325_2.1@51.521,28.737 51.521,29.476 51.156,29.841 Z1313_2.1@51.156,30.552 51.156,31.457 51.886,32.187 Z1312_2.2@51.886,33.092 51.886,34.241 52.066,34.421 52.066,34.997 52.066,36.357 51.521,36.902 C1330_2.2@51.116,36.902
SECONDARY-C18: C1324_2.1 C1330_2.1 IC1400_2.2 R1313_2.2 Z1312_2.1 | length 43.6
  Top w0.152: C1330_2.1@49.526,36.902 49.526,37.002 50.079,37.555 50.904,37.555 51.203,37.855 54.061,37.855 54.378,38.172 55.331,38.172 55.648,38.49 58.506,38.49 58.823,38.807 59.776,38.807 60.093,39.125 62.633,39.125 62.951,39.442 64.525,39.442 64.729,39.646 67.667,39.646 68.081,40.06 68.966,40.06 69.301,40.395 69.301,46.11 71.281,48.09 IC1400_2.2@72.123,48.09
  Top w0.254: R1313_2.2@47.711,25.537 47.711,28.044 48.404,28.737 C1324_2.1@48.981,28.737 48.981,32.016 48.616,32.381 Z1312_2.1@48.616,33.092 48.616,36.537 48.981,36.902 C1330_2.1@49.386,36.902
SECONDARY-DIGITAL-IO_0: R700_2.1 U700_2.4 | length 8
  Top w0.152: U700_2.4@52.942,12.923 54.992,12.923 56.991,14.922 56.991,16.347 57.772,17.127 R700_2.1@58.323,17.127
SECONDARY-DIGITAL-IO_1: R701_2.1 U700_2.5 | length 6.4
  Top w0.152: U700_2.5@52.942,13.573 55.166,13.573 56.736,15.143 R701_2.1@56.736,17.127
SECONDARY-DIGITAL-IO_2: R702_2.1 U700_2.6 | length 4.6
  Top w0.152: U700_2.6@52.942,14.223 54.228,14.223 55.148,15.143 R702_2.1@55.148,17.127
SECONDARY-DIGITAL-IO_3: R703_2.1 U700_2.7 | length 3.3
  Top w0.152: U700_2.7@52.942,14.873 53.644,14.873 53.975,15.205 53.975,16.192 53.561,16.607 R703_2.1@53.561,17.127
SECONDARY-DIGITAL-IO_4: R704_2.1 U700_2.9 | length 5.7
  Top w0.152: U700_2.9@47.242,15.523 47.944,15.523 48.295,15.875 51.276,15.875 51.973,16.572 R704_2.1@51.973,17.127
SECONDARY-DIGITAL-IO_5: R705_2.1 U700_2.10 | length 6.8
  Top w0.152: U700_2.10@47.242,14.873 46.54,14.873 46.196,15.218 46.196,15.716 46.672,16.192 49.97,16.192 50.386,16.608 R705_2.1@50.386,17.127
SECONDARY-DIGITAL-IO_6: R706_2.1 U700_2.11 | length 6.1
  Top w0.152: U700_2.11@47.242,14.223 46.492,14.223 45.879,14.836 45.879,15.875 46.514,16.51 48.081,16.51 48.698,17.127 R706_2.1@48.798,17.127
SECONDARY-DIGITAL-IO_7: R707_2.1 U700_2.12 | length 6
  Top w0.152: R707_2.1@47.211,17.127 46.337,17.127 45.561,16.351 45.561,14.287 46.197,13.652 46.275,13.573 U700_2.12@47.242,13.573
SECONDARY-GPIO1-OPT: R1408_2.1 R1425_2.1 | length 118.1
  Top w0.152: R1408_2.1@88.098,56.111 v1(88.986,56.111)
  Top w0.203: v1@5.293,24.329 R1425_2.1@5.293,25.153
  Signals1 w0.203: v1(5.277,24.329) 7.124,24.329 10.417,27.623 16.669,27.623 17.939,28.893 ; 17.939,28.876 17.939,33.165 18.183,33.41 24.216,33.41 24.533,33.727 24.533,47.697 24.851,48.015 35.328,48.015 35.756,48.442 35.756,54.17 35.646,54.28 35.646,55.718 39.355,59.428 88.517,59.428 88.986,58.959 v1(88.986,56.111)
SECONDARY-GPIO2-OPT: R1410_2.1 R1426_2.1 | length 127.7
  Top w0.152: R1410_2.1@88.148,51.507 v1(88.986,51.507)
  Top w0.203: v1@3.896,24.329 R1426_2.1@3.896,25.153
  Signals2 w0.203: v1(3.88,24.329) 4.457,24.329 5.341,23.445 9.276,23.445 9.92,24.089 9.92,24.495 10.421,24.996 13,24.996 13.116,24.88 13.596,24.88 14.176,25.46 14.176,26.082 16.034,27.94 v2(16.034,28.416)
  Signals1 w0.152: 16.034,28.124 16.034,33.638 16.123,33.727 23.898,33.727 24.216,34.045 24.216,48.015 24.533,48.332 35.011,48.332 35.502,48.823 35.502,54.064 35.328,54.238 35.328,55.76 39.25,59.682 88.749,59.682 89.621,58.81 89.621,51.825 89.303,51.507 v1(88.986,51.507)
SECONDARY-GPIO3-OPT: R1412_2.1 R1427_2.1 | length 134.4
  Top w0.152: R1412_2.1@88.148,48.332 v1(88.986,48.332)
  Top w0.203: v1@2.499,24.329 R1427_2.1@2.499,25.153
  Signals2 w0.203: v1(2.483,24.329) 2.483,24.694 2.88,25.091 6.362,25.091 7.703,23.749 8.184,23.749 8.595,24.16 8.595,24.964 9.299,25.669 12.12,25.669 12.917,26.466 12.917,28.358 v2(12.859,28.416)
  Signals1 w0.152: v2@12.7,28.416 12.859,28.575 12.859,33.8 13.103,34.045 23.581,34.045 23.898,34.362 23.898,48.332 24.216,48.65 34.693,48.65 35.248,49.204 35.248,53.959 35.011,54.196 35.011,55.801 39.145,59.936 89.13,59.936 89.938,59.127 89.938,48.65 89.621,48.332 v1(88.986,48.332)
SECONDARY-GPIO4-OPT: R1414_2.1
SECONDARY-GPIO5-OPT: R1416_2.1
SECONDARY-GPIO6: IC1400_2.44 R1421_2.1 | length 18.8
  Top w0.152: R1421_2.1@70.636,48.713 70.636,48.813 71.46,49.637 v1(71.46,49.729) ; IC1400_2.44@83.623,46.59 85.021,46.59 v1(85.176,46.745)
  Bottom w0.152: v1(71.46,49.729) 72.476,50.745 81.175,50.745 v1(85.176,46.745)
SECONDARY-GPIO7: IC1400_2.45 R1422_2.1 | length 19.1
  Top w0.152: R1422_2.1@70.636,50.11 70.636,50.21 71.006,50.581 71.295,50.581 v1(71.333,50.618) ; IC1400_2.45@83.623,47.09 84.737,47.09 85.143,47.496 v1(85.656,47.496)
  Bottom w0.152: v1(71.333,50.618) 71.714,50.999 82.152,50.999 v1(85.656,47.496)
SECONDARY-GPIO8: IC1400_2.46 R1423_2.1 | length 19.1
  Top w0.152: R1423_2.1@70.636,51.507 71.333,51.507 v1(71.333,51.46) ; IC1400_2.46@83.623,47.59 84.751,47.59 85.41,48.249 v1(85.84,48.249)
  Bottom w0.152: v1(71.333,51.46) 71.526,51.267 82.409,51.267 85.427,48.249 v1(85.84,48.249)
SECONDARY-GPIO9: IC1400_2.47 R1424_2.1 | length 3.6
  Top w0.152: IC1400_2.47@83.623,48.09 84.616,48.09 v1(85.493,48.967) 85.057,48.967 84.731,49.293 R1424_2.1@84.731,49.744
SECONDARY-IN+: TP1405_2.1 TR1400_2.4 | length 11.8
  Top w0.254: TR1400_2.4@18.092,8.73 18.833,8.73 19.136,8.426 19.136,7.795 19.453,7.477 26.018,7.477 27.55,5.946 TP1405_2.1@28.393,5.946
SECONDARY-IN-: TP1404_2.1 TR1400_2.6 | length 10.6
  Top w0.254: TR1400_2.6@22.105,8.73 25.718,8.73 27.675,6.773 29.58,6.773 30.407,5.946 TP1404_2.1@31.518,5.946
SECONDARY-LTC-DRIVE: IC1400_2.49 R605_2.1 R610_2.2 | length 47.3
  Top w0.152: R605_2.1@48.981,38.107 50.079,38.107 50.251,38.279 R610_2.2@50.251,40.012 50.951,40.012 v1(51.203,39.76) ; v1(73.111,49.92) 73.111,49.042 74.138,48.015 80.562,48.015 81.623,49.076 IC1400_2.49@81.623,50.54 ; IC1400_2.49@81.623,50.59 IC1400_2.49@81.658,50.555
  Signals1 w0.152: v1(51.203,39.76) 51.521,39.442 53.045,39.442 71.206,39.442 72.806,41.042 72.806,48.639 73.111,48.943 v1(73.111,49.92)
SECONDARY-MUX-DATA_TEMP: C106_2.2 R108_2.2 R1409_2.1 | length 53
  Top w0.254: R108_2.2@72.065,19.598 72.065,19.498 73.393,18.17 v1(73.746,18.17) ; C106_2.2@88.123,54.682 88.123,54.106 88.098,54.081 R1409_2.1@88.098,53.253 88.819,53.253 v1(88.839,53.273)
  Signals2 w0.254: v1(73.746,18.17) 73.746,46.745 75.046,48.044 77.268,48.044 78.191,48.967 78.191,52.045 79.845,53.7 88.412,53.7 v1(88.839,53.273)
SECONDARY-MUX-DATA_USER: C107_2.2 R109_2.2 R1411_2.1 | length 80.9
  Top w0.152: R109_2.2@21.453,53.717 23.013,53.717 C107_2.2@23.153,53.72 ; C107_2.2@23.153,53.717 23.707,53.717 23.898,53.908 23.898,54.682 v1(24.216,55) ; R1411_2.1@88.098,50.078 88.55,50.078 88.709,50.237 v1(88.986,50.237) v1@88.839,50.098
  Signals2 w0.152: v1(24.216,55) 24.533,54.682 30.375,54.682 30.548,54.856 31.218,54.856 31.882,54.191 33.652,54.191 34.253,54.792 34.803,54.792 37.233,57.222 63.684,57.222 63.97,56.935 64.471,56.935 65.312,57.777 70.8,57.777 71.355,57.222 71.692,57.222 71.929,56.985 72.705,56.985 73.179,57.459 89.201,57.459 89.938,56.722 89.938,50.555 89.621,50.237 v1(88.986,50.237)
SECONDARY-OUT+: TP1406_2.1 TR1400_2.1 | length 10.7
  Top w0.254: TR1400_2.1@12.072,8.73 12.8,8.73 13.103,8.426 13.103,6.898 13.58,6.422 19.365,6.422 19.841,5.946 TP1406_2.1@20.723,5.946
SECONDARY-OUT-: TP1407_2.1 TR1400_2.3 | length 9.9
  Top w0.254: TR1400_2.3@16.085,8.73 16.769,8.73 17.072,8.426 17.072,7.375 17.548,6.898 21.553,6.898 22.506,5.946 TP1407_2.1@24.196,5.946
SECONDARY-S1: IC1400_2.37
SECONDARY-S2: IC1400_2.35
SECONDARY-S3: IC1400_2.33
SECONDARY-S4: IC1400_2.31
SECONDARY-S5: IC1400_2.29
SECONDARY-S6: IC1400_2.27
SECONDARY-S7: IC1400_2.25
SECONDARY-S8: IC1400_2.23
SECONDARY-S9: IC1400_2.21
SECONDARY-S10: IC1400_2.19
SECONDARY-S11: IC1400_2.17
SECONDARY-S12: IC1400_2.15
SECONDARY-S13: IC1400_2.13
SECONDARY-S14: IC1400_2.11
SECONDARY-S15: IC1400_2.9
SECONDARY-S16: IC1400_2.7
SECONDARY-S17: IC1400_2.5
SECONDARY-S18: IC1400_2.3
SECONDARY-SCL: IC100_2.1 IC101_2.1 IC104_2.1 IC800_2.4 IC801_2.6 R1417_2.1 R1420_2.1 TP1409_2.1 U700_2.14 | length 240.8
  Top w0.152: IC101_2.1@6.821,50.185 6.821,49.703 7.73,48.794 8.189,48.794 8.514,49.118 8.514,50.236 8.409,50.342 8.409,53.228 8.514,53.334 8.514,55.237 9.535,56.257 18.806,56.257 v1(18.818,56.27) 18.818,50.555 18.728,50.464 18.589,50.464 18.298,50.174 18.018,50.174 18.007,50.185 IC104_2.1@16.981,50.185 ; IC104_2.1@16.951,50.174 IC104_2.1@16.981,50.174 ; R1417_2.1@88.098,40.597 88.581,40.597 89.577,39.601 91.158,39.601 91.506,39.948 IC801_2.6@91.506,40.972 91.506,41.422 90.891,42.037 v1(90.891,42.372) ; R1417_2.1@88.135,40.54 R1417_2.1@88.148,40.553 ; TP1409_2.1@90.573,51.348 91.936,51.348 92.141,51.143 92.141,50.314 91.321,49.494 91.321,48.385 91.677,48.029 R1420_2.1@92.228,48.029 92.228,44.26 v1(92.141,44.172)
  Top w0.254: IC800_2.4@40.091,41.42 IC800_2.4@40.093,41.417 40.093,42.615 v1(40.091,42.617) ; U700_2.14@47.242,12.273 48.165,12.273 48.505,12.613 v1(49.14,12.613) ; IC100_2.1@66.67,14.942 68.401,14.942 v1(68.507,14.836) ; R1417_2.1@88.078,40.597 88.078,39.333 v1(88.128,39.283)
  Signals2 w0.152: v1(18.818,56.27) 19.453,56.905 28.829,56.905 29.384,56.35 32.234,56.35 v1(32.788,56.905)
  Signals2 w0.254: v1(45.976,35.315) 45.944,35.283 45.944,13.09 46.421,12.613 v1(49.14,12.613)
  Signals1 w0.152: v1(32.788,56.905) 34.677,56.905 38.724,60.952 89.551,60.952 90.971,59.531 90.971,58.58 91.208,58.343 91.208,52.301 91.506,52.003 v1(91.506,51.349)
  Signals1 w0.254: v1(45.976,35.315) 45.976,36.732 46.464,37.22 73.111,37.22 73.708,37.817 86.661,37.817 v1(88.128,39.283) ; v1(49.14,12.613) 55.807,12.613 56.442,11.978 67.713,11.978 68.666,12.931 68.666,14.677 v1(68.507,14.836)
  Bottom w0.152: v1(90.891,42.372) 90.891,42.935 92.128,44.172 v1(92.141,44.172)
  Bottom w0.254: v1(40.091,42.617) 39.773,42.3 39.773,37.537 41.996,35.315 v1(45.976,35.315)
SECONDARY-SDA: IC100_2.3 IC101_2.3 IC104_2.3 IC800_2.5 IC801_2.5 R1415_2.1 R1419_2.1 TP1408_2.1 U700_2.15 | length 238.5
  Top w0.152: IC101_2.3@6.791,51.494 IC101_2.3@6.821,51.494 ; IC101_2.3@6.821,51.485 7.571,51.485 8.023,51.937 v1(8.023,55.635) ; IC104_2.3@16.951,51.494 IC104_2.3@17.741,51.494 ; IC104_2.3@16.981,51.485 17.731,51.485 IC104_2.3@17.741,51.494 ; v1(18.183,55.635) 18.183,51.937 IC104_2.3@17.741,51.494 ; R1415_2.1@88.098,43.728 89.922,43.728 90.236,43.415 IC801_2.5@90.236,40.972 ; 89.145,43.76 89.145,44.745 89.601,45.201 89.601,47.034 90.141,47.574 R1419_2.1@90.141,48.026 90.141,48.477 90.561,48.898 90.891,49.227 90.891,50.42 ; TP1408_2.1@90.573,52.777 89.681,51.885 89.681,50.812 90.073,50.42 90.891,50.42 ; v1(91.341,50.42) 90.891,50.42
  Top w0.254: IC800_2.5@41.993,41.417 41.993,42.615 v1(41.996,42.617) ; U700_2.15@47.242,11.623 48.467,11.623 v1(48.663,11.82) ; IC100_2.3@66.67,16.242 67.696,16.242 68.036,16.582 v1(68.19,16.582) ; v1(89.218,40.972) IC801_2.5@90.236,40.972
  Signals2 w0.152: v1(8.023,55.635) 8.341,55.952 17.866,55.952 v1(18.183,55.635) 18.183,55 18.501,54.682 22.628,54.682 23.898,55.952 v1(32.788,55.952)
  Signals2 w0.254: v1(45.488,37.22) 45.371,37.102 45.371,12.711 46.262,11.82 v1(48.663,11.82)
  Signals1 w0.152: v1(32.788,55.952) 34.084,55.952 38.829,60.698 89.446,60.698 90.717,59.426 90.717,58.475 90.891,58.301 90.891,50.785 91.256,50.42 v1(91.341,50.42)
  Signals1 w0.254: v1(45.488,37.22) 45.844,37.575 46.464,37.575 72.831,37.575 73.428,38.172 85.811,38.172 88.611,40.972 v1(89.218,40.972) ; v1(48.663,11.82) 55.807,11.82 56.125,11.502 69.46,11.502 70.253,12.296 70.253,15.471 69.142,16.582 v1(68.19,16.582)
  Bottom w0.254: v1(41.996,42.617) 41.996,37.855 42.631,37.22 v1(45.488,37.22)
SECONDARY-T-SENSOR_0: R107_2.1 R112_2.2 x202.16 | length 10.9
  Top w0.254: R112_2.2@69.46,8.58 70.477,8.58 71.206,7.851 73.614,7.851 74.337,7.127 74.337,5.83 73.789,5.83 73.27,5.311 72.793,5.311 72.317,4.835 x202.16@72.317,3.143
SECONDARY-T-SENSOR_1: R106_2.1 R113_2.2 x202.14 | length 9.1
  Top w0.254: R113_2.2@67.872,8.58 67.972,8.58 68.701,7.851 70.614,7.851 71.337,7.127 R106_2.1@71.337,7.027 71.337,5.655 71.152,5.47 70.412,5.47 69.777,4.835 x202.14@69.777,3.143
SECONDARY-T-SENSOR_2: R105_2.1 R114_2.2 x202.12 | length 7.3
  Top w0.254: R114_2.2@66.285,8.58 66.385,8.58 67.113,7.851 67.614,7.851 68.337,7.127 R105_2.1@68.337,7.027 68.337,5.798 67.692,5.152 67.386,5.152 67.237,5.003 x202.12@67.237,3.143
SECONDARY-T-SENSOR_3: R104_2.1 R115_2.2 x202.10 | length 6
  Top w0.254: x202.10@64.697,3.143 64.697,4.983 65.337,5.623 R104_2.1@65.337,7.027 65.337,7.127 64.697,7.768 R115_2.2@64.697,8.58
SECONDARY-T-SENSOR_4: R103_2.1 R116_2.2 x202.8 | length 5.8
  Top w0.254: x202.8@62.157,3.143 62.157,4.745 62.337,4.925 R103_2.1@62.337,7.027 62.337,7.127 63.11,7.899 R116_2.2@63.11,8.58
SECONDARY-T-SENSOR_5: R102_2.1 R117_2.2 x202.6 | length 6.9
  Top w0.254: x202.6@59.617,3.143 59.617,5.47 59.337,5.749 R102_2.1@59.337,7.027 59.337,7.127 60.061,7.851 60.693,7.851 61.422,8.58 R117_2.2@61.522,8.58
SECONDARY-T-SENSOR_6: R101_2.1 R118_2.2 x202.4 | length 8.4
  Top w0.254: x202.4@57.077,3.143 57.077,4.993 56.337,5.733 R101_2.1@56.337,7.027 56.888,7.027 57.712,7.851 59.106,7.851 59.835,8.58 R118_2.2@59.935,8.58
SECONDARY-T-SENSOR_7: R100_2.1 R119_2.2 x202.2 | length 10.1
  Top w0.254: x202.2@54.537,3.143 54.537,4.835 53.337,6.034 53.337,7.127 54.061,7.851 56.601,7.851 57.33,8.58 R119_2.2@58.347,8.58
SECONDARY-TEMP-ALERT: IC800_2.3 R800_2.1 | length 1.8
  Top w0.152: IC800_2.3@40.093,43.817 40.093,44.369 40.343,44.619 R800_2.1@40.343,45.475
SECONDARY-WDT: IC1400_2.56 R1404_2.1
SHDN_1: R601_1.1 R610_1.1 U600_1.4 | length 7.1
  Top w0.152: U600_1.4@104.451,46.427 104.926,46.427 105.496,45.857 105.496,44.205 105.178,43.887 104.451,43.887 104.161,43.597 R601_1.1@104.161,42.617 104.161,42.012 104.761,41.412 R610_1.1@104.861,41.412
SHDN_2: R601_2.1 R610_2.1 U600_2.4 | length 7.2
  Top w0.152: U600_2.4@49.841,46.427 50.316,46.427 50.886,45.857 50.886,43.887 50.568,43.57 49.952,43.57 49.551,43.169 R601_2.1@49.551,42.617 50.002,42.617 50.251,42.369 R610_2.1@50.251,41.412
SW_1: C602_1.1 L600_1.1 U600_1.12 U600_1.13 U600_1.14
SW_2: C602_2.1 L600_2.1 U600_2.12 U600_2.13 U600_2.14
VBAT+: F300.1 SJ300.1 X200.4 | length 15.4
  Top w0.406: F300.1@107.381,9.492 107.381,8.411 107.193,8.411 106.721,7.939 SJ300.1@106.721,7.387 106.721,6.457 107.022,6.156 115.128,6.156 116.153,5.131 X200.4@116.153,3.143
VBAT-: F320.1 SJ301.2 X200.24 | length 12
  Top w0.406: X200.24@141.553,3.143 145.397,3.143 148.741,6.487 SJ301.2@148.741,7.375 148.741,7.926 148.244,8.423 148.041,8.423 F320.1@148.041,9.505
VCC_1: C603_1.2 U600_1.10 | length 1.9
  Top w0.406: U600_1.10@110.351,45.777 111.234,45.777 111.337,45.674 C603_1.2@112.163,45.674
VCC_2: C603_2.2 U600_2.10 | length 1.9
  Top w0.406: U600_2.10@55.741,45.777 56.624,45.777 56.79,45.611 C603_2.2@57.617,45.611
VIN_1: C600_1.2 C601_1.2 Q600_1.3 Q600_1.8 R600_1.2 R609_1.1 U600_1.3 | length 11.7
  Top w0.406: C600_1.2@99.463,46.065 v4(99.463,47.38) ; R609_1.1@100.798,41.03 v4(102.003,41.03)
  Bottom w0.406: v4(99.463,47.38) 99.781,47.697 101.686,47.697 102.003,47.38 v4(102.003,41.03)
VIN_2: C600_2.2 C601_2.2 Q600_2.3 Q600_2.8 R600_2.2 R609_2.1 U600_2.3 | length 12.6
  Top w0.406: C600_2.2@44.853,46.065 v4(44.853,47.38) ; R609_2.1@46.188,40.712 v4(47.711,40.712)
  Bottom w0.406: v4(44.853,47.38) 45.171,47.697 47.393,47.697 47.711,47.38 v4(47.711,40.712)
pads on no net: Designator5.Hole_3.2 Designator6.Hole_3.2 Designator7.Hole_3.2 Designator8.Hole_3.2 Designator11.0 Designator12.0 IC801_1.1 IC801_1.2 IC801_2.1 IC801_2.2 IC1400_1.53 IC1400_1.54 IC1400_2.53 IC1400_2.54 TR1400_1.2 TR1400_1.5 TR1400_2.2 TR1400_2.5 U700_1.13 U700_2.13 X200.1 X200.2 X200.3